# Altium PCB PCB1.PcbDoc (part 1 of 2)
Units mm, origin at the board's own origin, x right, y up, seen from the top; angles counter-clockwise.
Board outline 148.88 x 148.12 mm, 2 copper layers (Top Layer, Bottom Layer); 121 components, 61 nets, 373 pads, 52 vias.
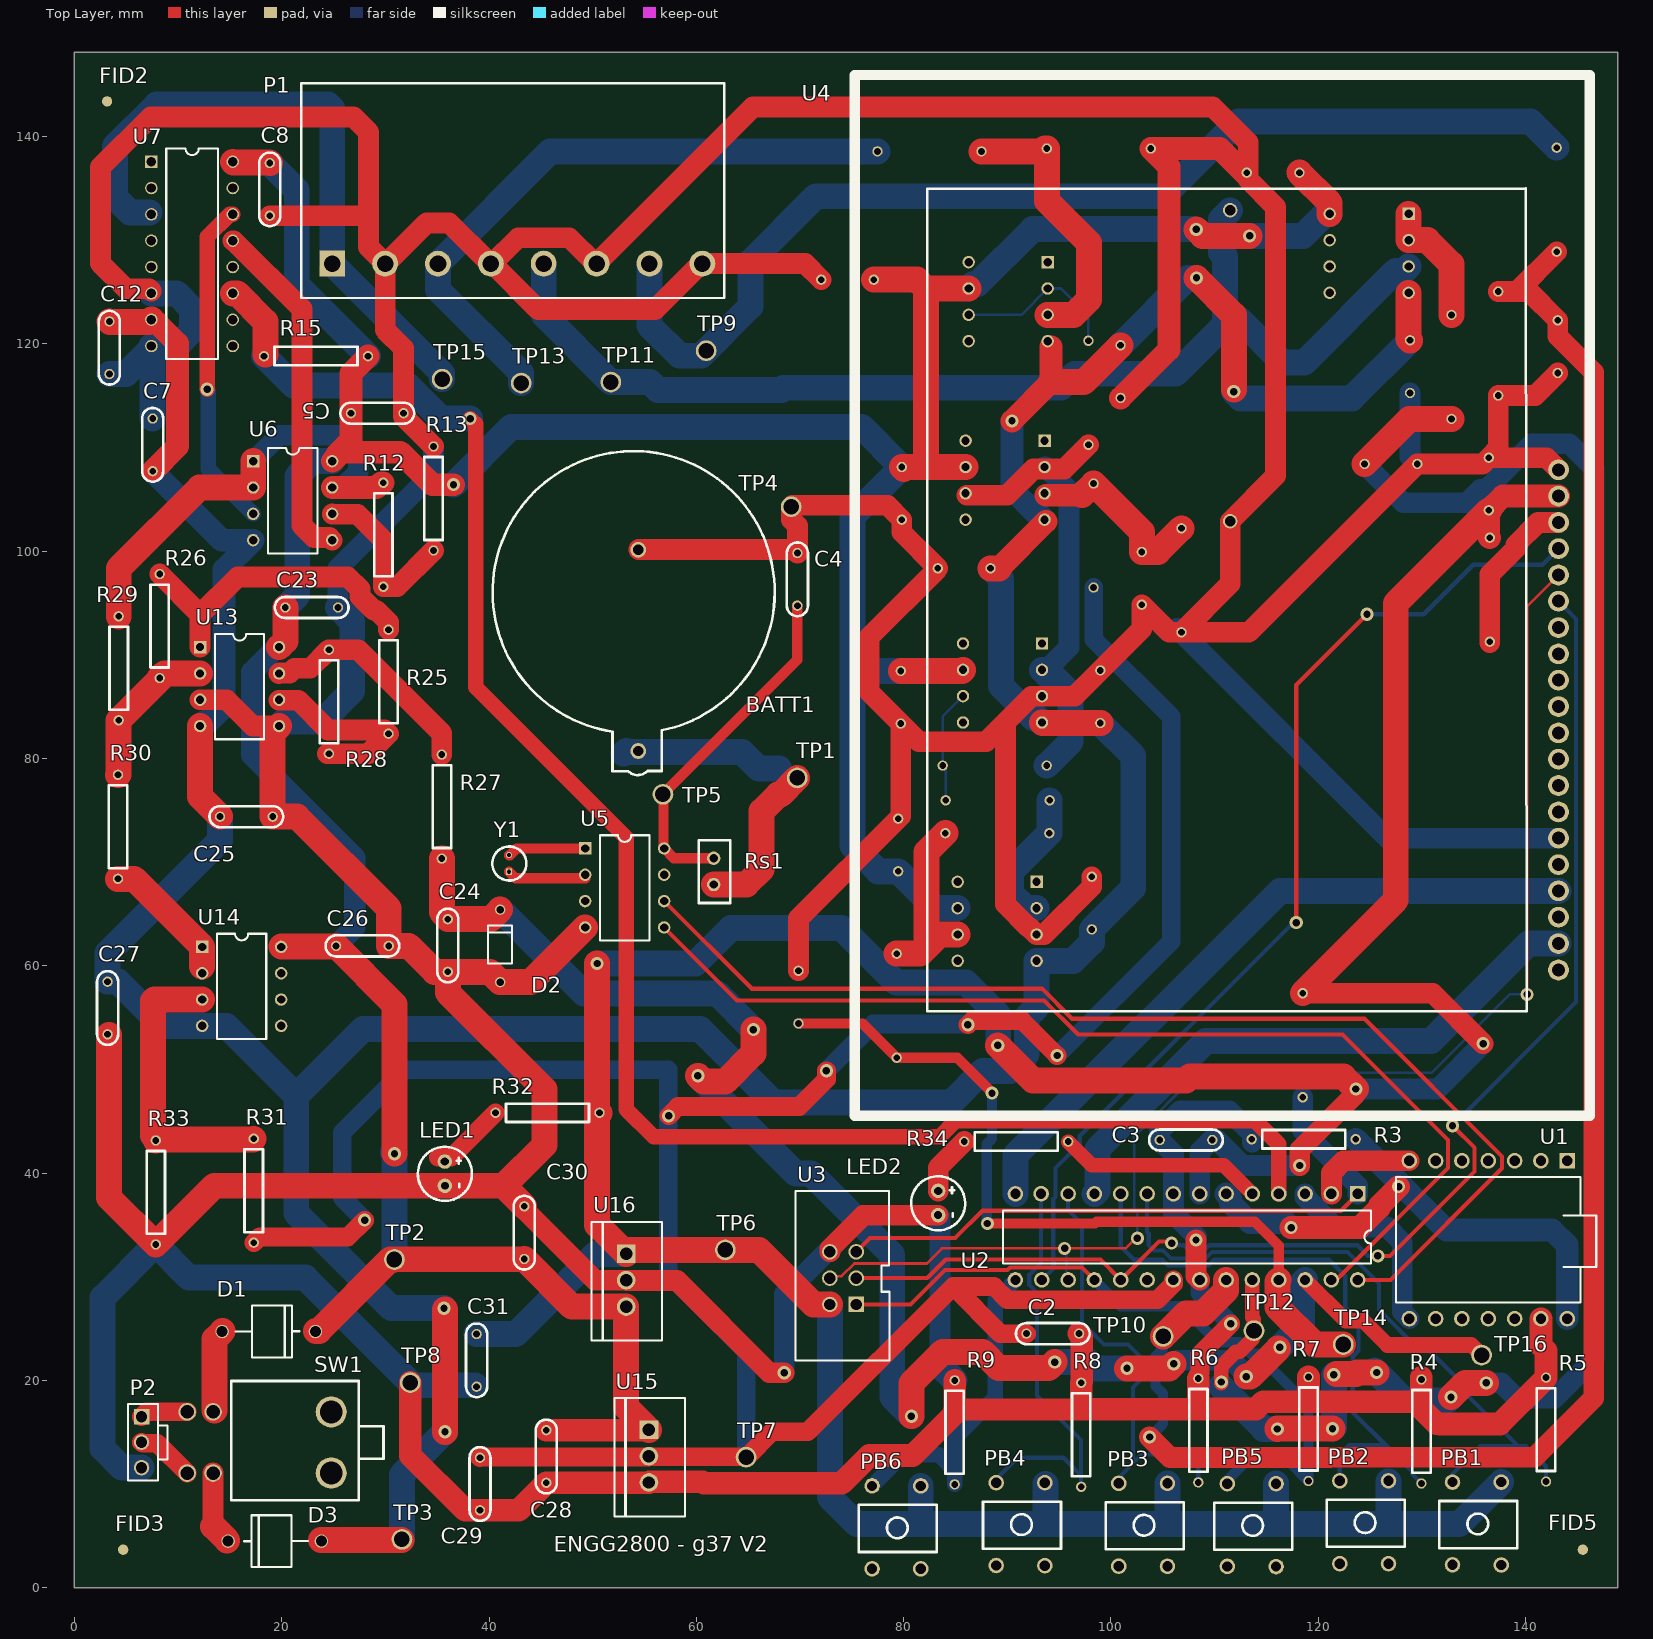
[diagram p0: Top Layer view]
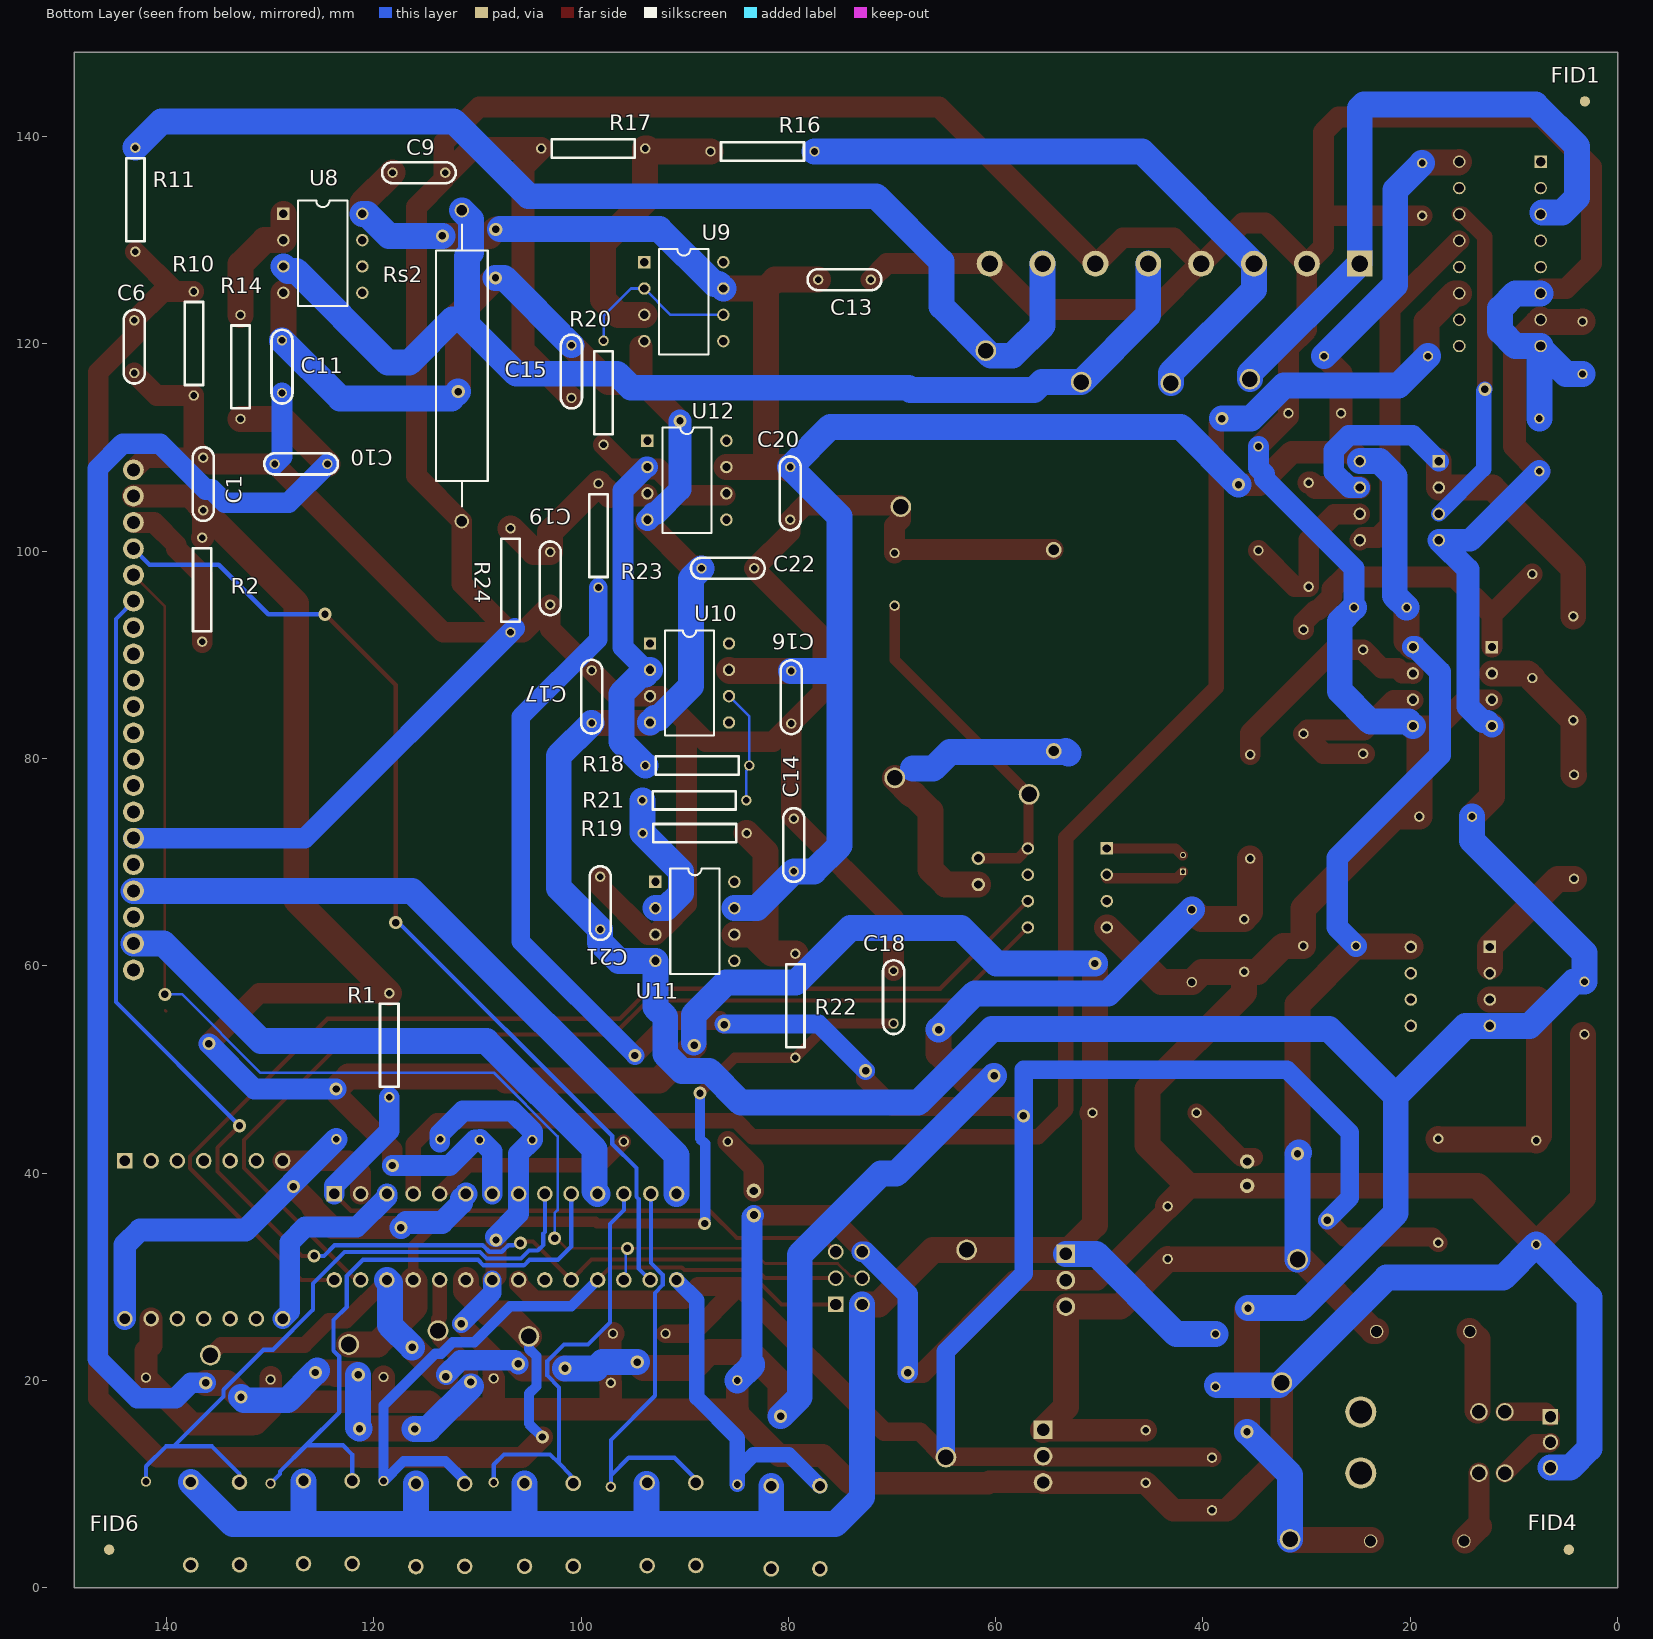
[diagram p1: Bottom Layer view, seen from below]

## Layer stack, top to bottom
Top Solder: solder mask 0.0102, Solder Resist, Dk 3.5
Top Layer: signal copper 0.0356
Dielectric 1: dielectric 0.32, FR-4, Dk 4.8
Bottom Layer: signal copper 0.0356
Bottom Solder: solder mask 0.0102, Solder Resist, Dk 3.5

## Board outline
0,0 148.875,0 148.875,148.125 0,148.125

## Design rules (kind name [scope] priority, off if disabled: settings)
Clearance [All] p1: gap=0.254 ignorepadtopadclearanceinfootprint=FALSE except(0: Arc-Hole Track-Hole SMDPad-Hole THPad-Hole Via-Hole Fill-Hole Poly-Hole Region-Hole Text-Hole)
PolygonConnect [All] p1: connectstyle=Relief reliefconductorwidth=0.254 reliefentries=4 polygonreliefangle="90 Angle" airgapwidth=0.254
RoutingVias [All] p1: holewidth=0.711 width=1.27 viastyle="Through Hole" minholewidth=0.711 minwidth=1.27 maxholewidth=0.711 maxwidth=1.27
SolderMaskExpansion [All] p1: expansion=0.102 istentingtop=FALSE
Width [All] p1: maxlimit=10 minlimit=0.254 preferedwidth=1 minimp=50.000000 maximp=50.000000 favimp=50.000000
30 further rules are at their usual default settings.

## Classes and differential pairs
component class Inputs2: C23 C24 C25 C26 C27 C28 C29 C30 C31 D1 D2 D3 LED1 LED2 P1 P2 R25 R26 R27 R28 R29 R30 R31 R32 R33 R34 SW1 TP9 TP10 TP11 TP12 TP13 TP14 TP15 TP16 U13 U14 U15 U16
component class Inputs1: C5 C6 C7 C8 C9 C10 C11 C12 C13 C14 C15 C16 C17 C18 C19 C20 C21 C22 R10 R11 R12 R13 R14 R15 R16 R17 R18 R19 R20 R21 R22 R23 R24 Rs2 U6 U7 U8 U9 U10 U11

## Components (designator, comment, footprint, x,y, rotation, side; value= is the part's Value field where it differs from the comment)
BATT1 "RTC_Battery" "BATTERY HOLDER" 54.4,80.725 r270 top
C1 "Capacitor" CAPACITOR 136.45,103.945 r90 bottom
C2 "Capacitor" CAPACITOR 91.845,24.525 r0 top
C3 "Capacitor" CAPACITOR 109.775,43.2 r180 top
C4 "Capacitor" CAPACITOR 69.75,94.75 r90 top
C5 "Capacitor" CAPACITOR 26.675,113.325 r0 top
C6 "Capacitor" CAPACITOR 143.1,122.28 r270 bottom
C7 "Capacitor" CAPACITOR 7.55,112.805 r270 top
C8 "Capacitor" CAPACITOR 18.85,137.45 r270 top
C9 "Capacitor" CAPACITOR 118.18,136.525 r180 bottom
C10 "Capacitor" CAPACITOR 129.55,108.425 r180 bottom
C11 "Capacitor" CAPACITOR 128.85,120.35 r270 bottom
C12 "Capacitor" CAPACITOR 3.375,117.095 r90 top
C13 "Capacitor" CAPACITOR 77.125,126.2 r180 bottom
C14 "Capacitor" CAPACITOR 79.475,69.12 r90 bottom
C15 "Capacitor" CAPACITOR 100.925,114.795 r90 bottom
C16 "Capacitor" CAPACITOR 79.725,88.455 r270 bottom
C17 "Capacitor" CAPACITOR 98.975,88.505 r270 bottom
C18 "Capacitor" CAPACITOR 69.85,59.525 r270 bottom
C19 "Capacitor" CAPACITOR 102.975,94.85 r90 bottom
C20 "Capacitor" CAPACITOR 79.825,108.125 r270 bottom
C21 "Capacitor" CAPACITOR 98.15,68.6 r270 bottom
C22 "Capacitor" CAPACITOR 83.3,98.35 r0 bottom
C23 "Capacitor" CAPACITOR 25.43,94.575 r180 top
C24 "Capacitor" CAPACITOR 36.025,59.425 r90 top
C25 "Capacitor" CAPACITOR 19.13,74.4 r180 top
C26 "Capacitor" CAPACITOR 25.245,61.925 r0 top
C27 "Capacitor" CAPACITOR 3.2,53.395 r90 top
C28 "Capacitor" CAPACITOR 45.525,10.125 r90 top
C29 "Capacitor" CAPACITOR 39.125,7.475 r90 top
C30 "Capacitor" CAPACITOR 43.4,36.805 r270 top
C31 "Capacitor" CAPACITOR 38.8,19.4 r90 top
D1 "Diode" DIODE 14.25,24.725 r0 top
D2 "3.3V" "ZENER DIODE (3V)" 41.075,58.425 r90 top
D3 "Diode" DIODE 23.825,4.5 r180 top
FID1 "FID_BOT" FIDUCIAL_TOP#1 3.15,143.4 r90 bottom
FID2 "FID_TOP" FIDUCIAL_TOP#2 3.15,143.4 r90 top
FID3 "FID_TOP" FIDUCIAL_TOP#2 4.7,3.675 r90 top
FID4 "FID_BOT" FIDUCIAL_TOP#1 4.7,3.675 r90 bottom
FID5 "FID_TOP" FIDUCIAL_TOP#2 145.525,3.675 r90 top
FID6 "FID_BOT" FIDUCIAL_TOP#1 145.525,3.675 r90 bottom
LED1 "RED" LED 35.75,41.125 r270 top
LED2 "Green" LED 83.335,38.29 r270 top
P1 "CKK 22.09.14" MEASUREMENT_SOCKET 24.875,127.75 r90 top
P2 "Molex Power Supply" MOLEX_POWER_SUPPLY 6.475,16.5 r0 top
PB1 "1825910-7" PUSHBUTTON 137.65,10.202 r270 top
PB2 "1825910-7" PUSHBUTTON 126.775,10.327 r270 top
PB3 "1825910-7" PUSHBUTTON 105.45,10.077 r270 top
PB4 "1825910-7" PUSHBUTTON 93.625,10.142 r270 top
PB5 "1825910-7" PUSHBUTTON 115.925,10.052 r270 top
PB6 "1825910-7" PUSHBUTTON 81.65,9.827 r270 top
R1 "Resistor" RESISTOR 118.5,57.358 r270 bottom
R2 "Resistor" RESISTOR 136.55,101.308 r270 bottom
R3 "Resistor" RESISTOR 113.575,43.275 r0 top
R4 "Resistor" RESISTOR 129.95,20.102 r270 top
R5 "Resistor" RESISTOR 141.975,20.283 r270 top
R6 "Resistor" RESISTOR 108.425,20.202 r270 top
R7 "Resistor" RESISTOR 119.05,20.335 r270 top
R8 "Resistor" RESISTOR 97.125,19.777 r270 top
R9 "Resistor" RESISTOR 84.925,20.01 r270 top
R10 "Resistor" RESISTOR 137.35,125.058 r270 bottom
R11 "Resistor" RESISTOR 143,128.9 r90 bottom
R12 "Resistor" RESISTOR 29.8,96.575 r90 top
R13 "Resistor" RESISTOR 34.65,110.108 r270 top
R14 "Resistor" RESISTOR 132.85,112.767 r90 bottom
R15 "4.7kΩ" RESISTOR 18.292,118.825 r0 top
R16 "Resistor" RESISTOR 77.475,138.575 r0 bottom
R17 "Resistor" RESISTOR 93.817,138.85 r0 bottom
R18 "Resistor" RESISTOR 93.8,79.325 r180 bottom
R19 "Resistor" RESISTOR 94.05,72.8 r180 bottom
R20 "Resistor" RESISTOR 97.825,120.308 r270 bottom
R21 "Resistor" RESISTOR 84.05,75.975 r0 bottom
R22 "Resistor" RESISTOR 79.325,61.175 r270 bottom
R23 "Resistor" RESISTOR 98.325,96.5 r90 bottom
R24 "Resistor" RESISTOR 106.8,92.175 r90 bottom
R25 "Resistor" RESISTOR 30.3,92.433 r270 top
R26 "Resistor" RESISTOR 8.225,87.767 r90 top
R27 "Resistor" RESISTOR 35.45,80.383 r270 top
R28 "Resistor" RESISTOR 24.55,80.475 r90 top
R29 "Resistor" RESISTOR 4.275,93.725 r270 top
R30 "Resistor" RESISTOR 4.2,68.4 r90 top
R31 "Resistor" RESISTOR 17.3,33.292 r90 top
R32 "300o" RESISTOR 50.658,45.825 r180 top
R33 "Resistor" RESISTOR 7.85,33.125 r90 top
R34 "Resistor" RESISTOR 95.875,43.05 r180 top
Rs1 "Removable Shunt" CURRENT_SHUNT 61.675,70.39 r270 top
Rs2 "DC_Shunt" DC_SHUNT 111.5,132.9 r270 bottom
SW1 "PB400EEQR1BLK" "PCBCOMPONENT_1 - DUPLICATE" 10.875,16.975 r0 top
TP1 "Red_Test_Point" TP 69.734,78.134 r0 top
TP2 "5010" TP 30.875,31.675 r0 top
TP3 "5010" TP 31.6,4.675 r0 top
TP4 "Red_Test_Point" TP 69.15,104.3 r0 top
TP5 "Red_Test_Point" TP 56.775,76.55 r0 top
TP6 "Red_Test_Point" TP 62.8,32.6 r0 top
TP7 "Red_Test_Point" TP 64.8,12.6 r0 top
TP8 "Black_Test_Point" TP 32.4,19.8 r0 top
TP9 "Yellow_Test_Point_1" TP 60.95,119.35 r0 top
TP10 "Yellow_Test_Point_1" TP 105.025,24.25 r0 top
TP11 "Yellow_Test_Point_1" TP 51.75,116.325 r0 top
TP12 "Yellow_Test_Point_1" TP 113.797,24.807 r90 top
TP13 "Yellow_Test_Point_1" TP 43.1,116.225 r90 top
TP14 "Yellow_Test_Point_1" TP 122.41,23.475 r90 top
TP15 "Yellow_Test_Point_1" TP 35.475,116.6 r90 top
TP16 "Yellow_Test_Point_1" TP 135.75,22.45 r90 top
U1 "Turtle" POLYGOT-TURTLE 144.02,41.2 r270 top
U2 "ATMEGA328P-PU" ATMEGA832P\ 123.805,38 r270 top
U3 "Encoder" ENCODER_NO_BREAKOUT 75.425,27.335 r180 top
U4 "LED Display" "LED DISPLAY" 146.175,135.6 r270 top
U5 "DS1307" "OP AMP" 49.275,71.33 r0 top
U6 "LM358P" "OP AMP" 17.25,108.69 r0 top
U7 "CD4051B" MULTIPLEXOR 7.425,137.58 r0 top
U8 "LM358P" "OP AMP" 128.72,132.555 r180 bottom
U9 "LF411CP" "OP AMP" 93.895,127.89 r180 bottom
U10 "LF411CP" "OP AMP" 93.345,91.1 r180 bottom
U11 "LF411CP" "OP AMP" 92.825,68.105 r180 bottom
U12 "LF411CP" "OP AMP" 93.595,110.665 r180 bottom
U13 "LM358P" "OP AMP" 12.125,90.755 r0 top
U14 "LM358P" "OP AMP" 12.325,61.83 r0 top
U15 "LM1117-3.3" "VOLTGE REGULATOR LM1117 (3.3)" 55.425,15.24 r0 top
U16 "LM7805" "VOLTGE REGULATOR LM7805 (5)" 53.245,32.215 r0 top
Y1 "Crystal" CRYSTAL 41.925,69.075 r90 top

## Footprints (in the part's own frame and the unit in brackets; to place one, negate y for a bottom-side part, rotate by r counter-clockwise, add the part's x,y. Pads: shape width x height; smd on the part's side, far side on the other; paste and mask are expansions set on the pad)
ATMEGA832P\ [mm]
  rect 1.5x1.5 hole 1: 1(0,0)
  round 1.5 hole 1: 2(0,-2.54) 3(0,-5.08) 4(0,-7.62) 5(0,-10.16) 6(0,-12.7) 7(0,-15.24) 8(0,-17.78) 9(0,-20.32) 10(0,-22.86) 11(0,-25.4) 12(0,-27.94) 13(-0.02,-30.55) 14(0,-33.02) 15(8.3,-33.02) 16(8.3,-30.48) 17(8.3,-27.94) 18(8.3,-25.4) 19(8.3,-22.86) 20(8.3,-20.32) 21(8.3,-17.78) 22(8.3,-15.24) 23(8.3,-12.7) 24(8.3,-10.16) 25(8.3,-7.62) 26(8.3,-5.08) 27(8.3,-2.54) 28(8.3,0)
  silkscreen extent 1.58,-34.21 6.72,1.27
"BATTERY HOLDER" [mil]
  round 60 hole 39.37: 1(0,0) 2(-764.17,0)
  silkscreen extent -1139,-554 91,518
CAPACITOR [mm]
  round 1 hole 0.65: 1(0,0) 2(5.08,0)
  silkscreen extent -1.01,-1.02 6.09,1.02
CRYSTAL [mm]
  rect 0.6x0.6 hole 0.4: 1(0,0)
  round 0.6 hole 0.4: 2(1.61,0)
  silkscreen extent -0.84,-1.67 2.44,1.61
CURRENT_SHUNT [mm]
  round 1.3 hole 0.8: 1(0,0) 2(2.54,0)
  silkscreen extent -1.74,-1.44 4.32,1.61
DC_SHUNT [mm]
  round 1.4 hole 1: 1(0,0) 2(30,0)
  silkscreen extent 1.4,-2.5 28.6,2.5
DIODE [mm]
  round 1.3 hole 1.05: 1(0,0) 2(9,0)
  silkscreen extent 1.3,-2.5 7.42,2.5
ENCODER_NO_BREAKOUT [mm]
  rect 1.5x1.5 hole 1.1: 1(0,0)
  round 1.5 hole 1.1: 2(0,-2.54) 3(0,-5.08) 4(2.54,-5.08) 5(2.54,-2.54) 6(2.54,0)
  silkscreen extent -3.19,-10.94 5.86,5.39
FIDUCIAL_TOP#1 [mm]
  round 1 / inner round 2 / far side round 0 all layers, no hole mask+0: F_T(0,0)
FIDUCIAL_TOP#2 [mm]
  round 1 / inner round 2 / far side round 0 all layers, no hole mask+1: F_T(0,0)
LED [mm]
  round 1.4 hole 0.8: 1(0,-0.01)
  round 1.4 hole 0.762: 2(2.34,-0.01)
  silkscreen extent -1.41,-2.62 3.8,2.6
"LED DISPLAY" [mm]
  round 2 hole 1.25: 1(76,-3) 2(73.45,-3) 3(70.9,-3) 4(68.36,-3) 5(65.84,-3) 6(63.28,-3) 7(60.75,-3) 8(58.2,-3) 9(55.66,-3) 10(53.12,-3) 11(50.58,-3) 12(48.04,-3) 13(45.5,-3) 14(42.96,-3) 15(40.42,-3) 16(37.89,-3) 17(35.35,-2.99) 18(32.82,-2.99) 19(30.28,-2.99) 20(27.74,-2.99)
  Top Layer lines w0.254: 79.985,-6.147 79.908,-6.071
  silkscreen extent -10.35,-70.89 90.04,0
MEASUREMENT_SOCKET [mm]
  rect 2.5x2.5 hole 1.6: 1(0,0)
  round 2.5 hole 1.6: 2(0,-5.1) 3(0,-10.2) 4(0,-15.3) 5(0,-20.4) 6(0,-25.5) 7(0,-30.6) 8(0,-35.7)
  silkscreen extent -3.3,-37.8 17.4,3
MOLEX_POWER_SUPPLY [mm]
  rect 1.5x1.5 hole 1.1: 1(0,0)
  round 1.5 hole 1.1: 2(0,-2.45) 3(0,-4.9)
  silkscreen extent -1.29,-6.14 2.5,1.24
MULTIPLEXOR [mm]
  rect 1.2x1.2 hole 0.9: 1(0,0)
  round 1.2 hole 0.9: 2(0,-2.54) 3(0,-5.08) 4(0,-7.62) 5(0,-10.16) 6(0,-12.7) 7(0,-15.24) 8(0,-17.78) 9(7.85,-17.78) 10(7.85,-15.24) 11(7.85,-12.7) 12(7.85,-10.16) 13(7.85,-7.62) 14(7.85,-5.08) 15(7.85,-2.54) 16(7.85,0)
  silkscreen extent 1.43,-19.05 6.42,1.27
"OP AMP" [mm]
  rect 1.2x1.2 hole 0.8: 1(0,0)
  round 1.2 hole 0.8: 2(0,-2.54) 3(0,-5.08) 4(0,-7.62) 5(7.62,-7.62) 6(7.62,-5.08) 7(7.62,-2.54) 8(7.62,0)
  silkscreen extent 1.43,-8.89 6.19,1.27
"PCBCOMPONENT_1 - DUPLICATE" [mm]
  round 1.7 hole 1.3: 1(0,0) 2(2.5,0) 3(0,-5.9) 4(2.5,-5.9)
  round 3 hole 2.2: B1(13.9,-5.9) B2(13.9,0)
  silkscreen extent 4.24,-8.52 18.95,2.98
POLYGOT-TURTLE [mm]
  rect 1.5x1.5 hole 1: 1(0,0)
  round 1.5 hole 1: 2(0,-2.54) 3(0,-5.08) 4(0,-7.62) 5(0,-10.16) 6(0,-12.7) 7(0,-15.24) 8(15.24,-15.24) 9(15.24,-12.7) 10(15.24,-10.16) 11(15.24,-7.62) 12(15.24,-5.08) 13(15.24,-2.54) 14(15.24,0)
  silkscreen extent 1.57,-16.51 13.67,2.79
PUSHBUTTON [mm]
  round 1.5 hole 1: 1(0,0) 2(0,-4.7) 3(8,0) 4(7.99,-4.7)
  silkscreen extent 1.83,-5.97 6.37,1.56
RESISTOR [mm]
  round 1 hole 0.65: 1(0,0) 2(10.033,0)
  silkscreen extent 1.02,-0.89 9.02,0.89
TP [mm]
  round 2 hole 1.5: 1(0,0)
"VOLTGE REGULATOR LM1117 (3.3)" [mm]
  rect 1.8x1.8 hole 1.2: 1(0,0)
  round 1.8 hole 1.2: 2(0,-5.08) 3(0,-2.54)
  silkscreen extent -3.34,-8.34 3.47,3.08
"VOLTGE REGULATOR LM7805 (5)" [mm]
  round 1.8 hole 1.2: 1(-0.02,-5.08) 2(-0.02,-2.54)
  rect 1.8x1.8 hole 1.2: 3(-0.02,0)
  silkscreen extent -3.36,-8.34 3.45,3.08
"ZENER DIODE (3V)" [mm]
  round 1 hole 0.75: 1(0,0) 2(7,0)
  silkscreen extent 1.82,-1.15 5.48,1.18

## Part data
D2: library part "Zener Diode"
FID1 FID4 FID6: library part FID_Bottom
LED1: library part RED_LED
LED2: library part Green_LED
P1: library part Measurement_Input_Terminal
PB1 PB2 PB3 PB4 PB5 PB6: "Keypad Switch, 1 Switches, SPST, Momentary, 0.05A, 24VDC, 2.548N, Solder Terminal, Panel Mount", Color="Black, Red", Contact Current Rating=50mA, Contact Resistance=100mΩ, Manufacturer="TE Connectivity", Manufacturer Lifecycle Status=ACTIVE, Max Operating Temperature=85°C, Max Voltage Rating (DC)=24V, Min Operating Temperature=-35°C, Operating Force=2.548N, Supplier Part Number 1=450-1804-ND, Actuator Length=1.397mm, Actuator Material=PBT, Category="Pushbutton Switches", China RoHS=Compliant, ComponentLink1Description=https://datasheet.octopart.com:443/1825910-7-TE-Connectivity-datasheet-179971976.pdf?src-supplier=IHS, ComponentLink1URL=https://datasheet.octopart.com:443/1825910-7-TE-Connectivity-datasheet-179971976.pdf?src-supplier=IHS, ComponentLink2Description=https://sigma.octopart.com:443/101748000/technical_drawing/TE-Connectivity-1825910-7.pdf?src-supplier=Sager+Electronics, ComponentLink2URL=https://sigma.octopart.com:443/101748000/technical_drawing/TE-Connectivity-1825910-7.pdf?src-supplier=Sager+Electronics, ComponentLink3Description=https://sigma.octopart.com:443/12291753/technical_drawing/TE-Connectivity-1825910-7.pdf?src-supplier=TE+Connectivity, ComponentLink3URL=https://sigma.octopart.com:443/12291753/technical_drawing/TE-Connectivity-1825910-7.pdf?src-supplier=TE+Connectivity, ComponentLink4Description=https://datasheet.octopart.com:443/1825910-7-TE-Connectivity-datasheet-10294628.pdf?src-supplier=Newark, ComponentLink4URL=https://datasheet.octopart.com:443/1825910-7-TE-Connectivity-datasheet-10294628.pdf?src-supplier=Newark, ComponentLink5Description=https://sigma.octopart.com:443/58177301/technical_drawing/TE-Connectivity-1825910-7.pdf?src-supplier=Farnell, ComponentLink5URL=https://sigma.octopart.com:443/58177301/technical_drawing/TE-Connectivity-1825910-7.pdf?src-supplier=Farnell, ComponentLink6Description=https://datasheet.octopart.com:443/1825910-7-TE-Connectivity---Alcoswitch-datasheet-33021037.pdf?src-supplier=Farnell, ComponentLink6URL=https://datasheet.octopart.com:443/1825910-7-TE-Connectivity---Alcoswitch-datasheet-33021037.pdf?src-supplier=Farnell, ComponentLink7Description=https://datasheet.octopart.com:443/1825910-7-TE-Connectivity---AMP-datasheet-23715109.pdf?src-supplier=Electro+Sonic, ComponentLink7URL=https://datasheet.octopart.com:443/1825910-7-TE-Connectivity---AMP-datasheet-23715109.pdf?src-supplier=Electro+Sonic, ComponentLink8Description=https://datasheet.octopart.com:443/1825910-7-TE-Connectivity-datasheet-145419879.pdf?src-supplier=RS+(Formerly+Allied+Electronics), ComponentLink8URL=https://datasheet.octopart.com:443/1825910-7-TE-Connectivity-datasheet-145419879.pdf?src-supplier=RS+(Formerly+Allied+Electronics), ComponentLink9Description=https://datasheet.octopart.com:443/1825910-7-TE-Connectivity---AMP-datasheet-189108451.pdf?src-supplier=Master+Electronics, ComponentLink9URL=https://datasheet.octopart.com:443/1825910-7-TE-Connectivity---AMP-datasheet-189108451.pdf?src-supplier=Master+Electronics, ComponentLink10Description=http://sigma.octopart.com:80/14574254/rohs_statement/TE-Connectivity-1825910-7.pdf?src-supplier=Compliance+Statements, ComponentLink10URL=http://sigma.octopart.com:80/14574254/rohs_statement/TE-Connectivity-1825910-7.pdf?src-supplier=Compliance+Statements, ComponentLink11Description=http://sigma.octopart.com:80/41598134/materials_sheet/TE-Connectivity-1825910-7.pdf?src-supplier=Compliance+Statements, ComponentLink11URL=http://sigma.octopart.com:80/41598134/materials_sheet/TE-Connectivity-1825910-7.pdf?src-supplier=Compliance+Statements, Contact Material=Silver, Contact Plating=Silver, Current Rating=50mA, Depth=7.8mm, Electrical Life=100kcycles, ELV=Compliant, Export Control Classification Number (ECCN) Code=EAR99, Harmonized Tariff Schedule (HTS) Code=8536.50.90.40, Height=3.61mm, Housing Material=Nylon, Illumination Type="Illuminated, Non-Illuminated", Introduction Date=2008-01-30, Lead Free="Lead Free", Length=5.99mm, Lifecycle Status=Production, Manufacturer Part Number=1825910-7, Max Current Rating=50mA, Mechanical Life=100kcycles, Mount="Surface Mount, Through Hole", Number of Positions=1, Orientation=Straight, Packaging=Bulk, Pricing 1="1=0.13, 10=0.118, 25=0.1112, 100=0.1001, 250=0.093, 750=0.08485, 1500=0.08009, 3000=0.07565, 5250=0.07234 (USD)", Radiation Hardening=No, REACH SVHC=Yes, RoHS=Compliant, Schedule B="8536509065, 8536509065|8536509065|8536509065|8536509065|8536509065|8536509065|8536509065|8536509065|8536509065|8536509065|8536509065|8536509065|8536509065|8536509065|8536509065|8536509065|8536509065|8536509065|8536509065|8536509065|8536509065|8536509065|8536509065|85", Stock 1=35870, Supplier 1=DigiKey, Switch Function=Off-Mom, Switch Travel=250µm, Termination="PC Pins, Solder", Throw Configuration=SPST, Type=Switch, Voltage Rating (DC)=24V
R15 R32: library part Resistor
Rs1: library part Current_Test_Shunt, "Current_Shunt"
SW1: "Pushbutton Switch, DPST, Standard Through Hole, Right Angle, Off-On Function, 30V, Black", Contact Current Rating=3A, Contact Resistance=30mΩ, Insulation Resistance=500MΩ, Manufacturer=E-Switch, Max Operating Temperature=60°C, Max Voltage Rating (DC)=30V, Min Operating Temperature=-5°C, Operating Force=7N, Supplier Part Number 1=EG5547-ND, Actuator Length=10.4902mm, Category="Pushbutton Switches", ComponentLink1Description=https://datasheet.octopart.com:443/PB400EEQR1BLK-E-Switch-datasheet-182202396.pdf?src-supplier=IHS, ComponentLink1URL=https://datasheet.octopart.com:443/PB400EEQR1BLK-E-Switch-datasheet-182202396.pdf?src-supplier=IHS, ComponentLink2Description=https://datasheet.octopart.com:443/PB400EEQR1BLK-E-Switch-datasheet-190233233.pdf?src-supplier=New+Yorker+Electronics, ComponentLink2URL=https://datasheet.octopart.com:443/PB400EEQR1BLK-E-Switch-datasheet-190233233.pdf?src-supplier=New+Yorker+Electronics, ComponentLink3Description=https://datasheet.octopart.com:443/PB400EEQR1BLK-E-Switch-datasheet-103039574.pdf?src-supplier=element14+APAC, ComponentLink3URL=https://datasheet.octopart.com:443/PB400EEQR1BLK-E-Switch-datasheet-103039574.pdf?src-supplier=element14+APAC, ComponentLink4Description=https://datasheet.octopart.com:443/PB400EEQR1BLK-E-Switch-datasheet-156105207.pdf?src-supplier=Future+Electronics, ComponentLink4URL=https://datasheet.octopart.com:443/PB400EEQR1BLK-E-Switch-datasheet-156105207.pdf?src-supplier=Future+Electronics, Contact Material=Silver, Electrical Life=6kcycles, Export Control Classification Number (ECCN) Code=EAR99, Harmonized Tariff Schedule (HTS) Code=8536.50.90.33, Height=10.2mm, Introduction Date=2017-12-19, Length=11mm, Lifecycle Status=Production, Manufacturer Part Number=PB400EEQR1BLK, Max Current Rating=3A, Number of Positions=2, Pricing 1="1=2.09, 10=1.807, 25=1.7048, 50=1.6308, 100=1.56, 324=1.4466, 648=1.38355, 1296=1.32313 (USD)", REACH SVHC=Yes, RoHS=Compliant, Stock 1=7960, Supplier 1=DigiKey, Throw Configuration=DPST
TP2 TP3: library part Red_Test_Point
U1: library part 102010328, "SAMD21 Microcontroller Development Board 0.0327MHz/48MHzCPU 32KB RAM 256KB Flash", Manufacturer="Seeed Studio", Supplier Part Number 1=1597-102010328-ND, Category="DSPs - Digital Signal Processors", Manufacturer Part Number=102010328, Pricing 1="1=5.4 (USD)", Schedule B=8471490000, Stock 1=4270, Supplier 1=DigiKey
U2: "Microchip - ATMEGA328P-PU - Microcontroller Mcu, 8 Bit, Atmega, 20MHZ, DIP-28", Case/Package=PDIP, Frequency=20MHz, Manufacturer=Microchip, Manufacturer Lifecycle Status=REL, Max Operating Temperature=85°C, Max Supply Voltage=5.5V, Min Operating Temperature=-40°C, Min Supply Voltage=1.8V, Supplier Part Number 1=ATMEGA328P-PU-ND, Category=Microcontrollers, ComponentLink1Description=https://datasheet.octopart.com:443/ATMEGA328P-PU-Microchip-datasheet-147334532.pdf?src-supplier=Microchip, ComponentLink1URL=https://datasheet.octopart.com:443/ATMEGA328P-PU-Microchip-datasheet-147334532.pdf?src-supplier=Microchip, ComponentLink2Description=https://datasheet.octopart.com:443/ATMEGA328P-PU-Microchip-datasheet-148646239.pdf?src-supplier=Microchip, ComponentLink2URL=https://datasheet.octopart.com:443/ATMEGA328P-PU-Microchip-datasheet-148646239.pdf?src-supplier=Microchip, ComponentLink3Description=https://datasheet.octopart.com:443/ATMEGA328P-PU-Microchip-datasheet-68295846.pdf?src-supplier=SHENGYU+ELECTRONICS, ComponentLink3URL=https://datasheet.octopart.com:443/ATMEGA328P-PU-Microchip-datasheet-68295846.pdf?src-supplier=SHENGYU+ELECTRONICS, ComponentLink4Description=https://datasheet.octopart.com:443/ATMEGA328P-PU-Microchip-datasheet-14421303.pdf?src-supplier=Upverter, ComponentLink4URL=https://datasheet.octopart.com:443/ATMEGA328P-PU-Microchip-datasheet-14421303.pdf?src-supplier=Upverter, ComponentLink5Description=https://datasheet.octopart.com:443/ATMEGA328P-PU-Atmel-datasheet-34147914.pdf?src-supplier=Upverter, ComponentLink5URL=https://datasheet.octopart.com:443/ATMEGA328P-PU-Atmel-datasheet-34147914.pdf?src-supplier=Upverter, ComponentLink6Description=https://datasheet.octopart.com:443/ATMEGA328P-PU-Atmel-datasheet-14353408.pdf?src-supplier=Upverter, ComponentLink6URL=https://datasheet.octopart.com:443/ATMEGA328P-PU-Atmel-datasheet-14353408.pdf?src-supplier=Upverter, ComponentLink7Description=https://datasheet.octopart.com:443/ATMEGA328P-PU-Microchip-datasheet-133520744.pdf?src-supplier=LKR, ComponentLink7URL=https://datasheet.octopart.com:443/ATMEGA328P-PU-Microchip-datasheet-133520744.pdf?src-supplier=LKR, ComponentLink8Description=https://datasheet.octopart.com:443/ATMEGA328P-PU-Microchip-datasheet-62316222.pdf?src-supplier=element14+APAC, ComponentLink8URL=https://datasheet.octopart.com:443/ATMEGA328P-PU-Microchip-datasheet-62316222.pdf?src-supplier=element14+APAC, ComponentLink9Description=https://datasheet.octopart.com:443/ATMEGA328P-PU-Atmel-datasheet-13381135.pdf?src-supplier=element14+APAC, ComponentLink9URL=https://datasheet.octopart.com:443/ATMEGA328P-PU-Atmel-datasheet-13381135.pdf?src-supplier=element14+APAC, ComponentLink10Description=https://datasheet.octopart.com:443/ATMEGA328P-PU-Microchip-datasheet-154741723.pdf?src-supplier=Electro+Sonic, ComponentLink10URL=https://datasheet.octopart.com:443/ATMEGA328P-PU-Microchip-datasheet-154741723.pdf?src-supplier=Electro+Sonic, ComponentLink11Description=https://datasheet.octopart.com:443/ATMEGA328P-PU-Microchip-datasheet-100453898.pdf?src-supplier=Burklin+Elektronik, ComponentLink11URL=https://datasheet.octopart.com:443/ATMEGA328P-PU-Microchip-datasheet-100453898.pdf?src-supplier=Burklin+Elektronik, ComponentLink12Description=https://datasheet.octopart.com:443/ATMEGA328P-PU-Atmel-datasheet-30457899.pdf?src-supplier=Seeed+Studio, ComponentLink12URL=https://datasheet.octopart.com:443/ATMEGA328P-PU-Atmel-datasheet-30457899.pdf?src-supplier=Seeed+Studio, ComponentLink13Description=https://datasheet.octopart.com:443/ATMEGA328P-PU-Microchip-datasheet-10842036.pdf?src-supplier=SOS+electronic, ComponentLink13URL=https://datasheet.octopart.com:443/ATMEGA328P-PU-Microchip-datasheet-10842036.pdf?src-supplier=SOS+electronic, ComponentLink14Description=https://datasheet.octopart.com:443/ATMEGA328P-PU-Microchip-datasheet-8364063.pdf?src-supplier=Jameco, ComponentLink14URL=https://datasheet.octopart.com:443/ATMEGA328P-PU-Microchip-datasheet-8364063.pdf?src-supplier=Jameco, ComponentLink15Description=https://datasheet.octopart.com:443/ATMEGA328P-PU-Microchip-datasheet-154323124.pdf?src-supplier=Jameco, ComponentLink15URL=https://datasheet.octopart.com:443/ATMEGA328P-PU-Microchip-datasheet-154323124.pdf?src-supplier=Jameco, ComponentLink16Description=https://datasheet.octopart.com:443/ATMEGA328P-PU-Atmel-datasheet-10389530.pdf?src-supplier=Newark, ComponentLink16URL=https://datasheet.octopart.com:443/ATMEGA328P-PU-Atmel-datasheet-10389530.pdf?src-supplier=Newark, ComponentLink17Description=https://datasheet.octopart.com:443/ATMEGA328P-PU-Microchip-datasheet-65729177.pdf?src-supplier=TME, ComponentLink17URL=https://datasheet.octopart.com:443/ATMEGA328P-PU-Microchip-datasheet-65729177.pdf?src-supplier=TME, ComponentLink18Description=https://datasheet.octopart.com:443/ATMEGA328P-PU-Microchip-datasheet-101746195.pdf?src-supplier=Future+Electronics, ComponentLink18URL=https://datasheet.octopart.com:443/ATMEGA328P-PU-Microchip-datasheet-101746195.pdf?src-supplier=Future+Electronics, ComponentLink19Description=http://sigma.octopart.com:80/188450569/materials_sheet/Microchip-ATMEGA328P-PU.pdf?src-supplier=Compliance+Statements, ComponentLink19URL=http://sigma.octopart.com:80/188450569/materials_sheet/Microchip-ATMEGA328P-PU.pdf?src-supplier=Compliance+Statements, ComponentLink20Description=http://sigma.octopart.com:80/rohs_statement/Microchip-company-71.pdf?src-supplier=Compliance+Statements, ComponentLink20URL=http://sigma.octopart.com:80/rohs_statement/Microchip-company-71.pdf?src-supplier=Compliance+Statements, ComponentLink21Description=http://sigma.octopart.com:80/reach_statement/Microchip-company-70.pdf?src-supplier=Compliance+Statements, ComponentLink21URL=http://sigma.octopart.com:80/reach_statement/Microchip-company-70.pdf?src-supplier=Compliance+Statements, ComponentLink22Description=http://sigma.octopart.com:80/conflict_mineral_statement/Microchip-company-69.pdf?src-supplier=Compliance+Statements, ComponentLink22URL=http://sigma.octopart.com:80/conflict_mineral_statement/Microchip-company-69.pdf?src-supplier=Compliance+Statements, ComponentLink23Description=http://sigma.octopart.com:80/conflict_mineral_statement/Microchip-company-68.pdf?src-supplier=Compliance+Statements, ComponentLink23URL=http://sigma.octopart.com:80/conflict_mineral_statement/Microchip-company-68.pdf?src-supplier=Compliance+Statements, ComponentLink24Description=http://sigma.octopart.com:80/reach_statement/Atmel-company-6.pdf?src-supplier=Compliance+Statements, ComponentLink24URL=http://sigma.octopart.com:80/reach_statement/Atmel-company-6.pdf?src-supplier=Compliance+Statements, ComponentLink25Description=http://sigma.octopart.com:80/rohs_statement/Atmel-company-5.pdf?src-supplier=Compliance+Statements, ComponentLink25URL=http://sigma.octopart.com:80/rohs_statement/Atmel-company-5.pdf?src-supplier=Compliance+Statements, ComponentLink26Description=http://sigma.octopart.com:80/rohs_statement/Atmel-company-4.pdf?src-supplier=Compliance+Statements, ComponentLink26URL=http://sigma.octopart.com:80/rohs_statement/Atmel-company-4.pdf?src-supplier=Compliance+Statements, Contact Plating=Tin, Core Architecture=AVR, Country of Assembly=Thailand, Country of Fabrication="United States of America", Country of Origin=Thailand, Data Bus Width=8b, Export Control Classification Number (ECCN) Code=EAR99, Harmonized Tariff Schedule (HTS) Code=8542.31.0015, Height=3.28mm, Interface="2-Wire, I2C, SPI, UART, USART", Lead Free="Lead Free", Length=37.4mm, Lifecycle Status=Production, Manufacturer Part Number=ATMEGA328P-PU, Max Frequency=20MHz, Memory Size=32kB, Memory Type=FLASH, Mount="Through Hole", Number of ADC Channels=6, Number of I2C Channels=1, Number of I/Os=23, Number of Pins=28, Number of Programmable I/O=23, Number of PWM Channels=6, Number of SPI Channels=1, Number of Timers/Counters=3, Oscillator Type=Internal, Peripherals="Brown-out Detect/Reset, POR, PWM, WDT", Pricing 1="1=2.89, 25=2.65, 100=2.39 (USD)", Projected EOL Date=2039-11-04, Radiation Hardening=No, RAM Size=2kB, REACH SVHC=No, RoHS=Compliant, Schedule B="8542310000, 8542310000|8542310000|8542310000|8542310000|8542310000", Stock 1=49916, Supplier 1=DigiKey, Watchdog Timer=Yes, Width=6.76mm
U3: library part 1465, "Adafruit 6-Pin Avr Isp Breadboard Adapter Mini Kit", Manufacturer="Adafruit Industries", Supplier Part Number 1=1528-1189-ND, Category=Uncategorized, Manufacturer Part Number=1465, Pricing 1="1=0.95 (USD)", RoHS=Compliant, Schedule B="8542900000, 8542900000|8542900000|8542900000|8542900000|8542900000", Stock 1=113, Supplier 1=DigiKey
U4: library part Display
U5: library part RTC
U6 U8 U13 U14: "Operational Amplifier, Dual, 700 Khz, 2, 0.4 V/ S, 1.5V To 16V, Dip, 8 Rohs Compliant: Yes", Case/Package=PDIP, Dual Supply Voltage=9V, Input Bias Current=250nA, Input Offset Voltage (Vos)=7mV, Manufacturer="Texas Instruments", Manufacturer Lifecycle Status=ACTIVE, Max Dual Supply Voltage=16V, Max Operating Temperature=70°C, Max Supply Current=700µA, Max Supply Voltage=32V, Min Dual Supply Voltage=1.5V, Min Operating Temperature=0°C, Min Supply Voltage=3V, Nominal Supply Current=1.2mA, Operating Supply Current=1mA, Output Current=30mA, Power Supply Rejection Ratio (PSRR)=65dB, Supplier Part Number 1=296-1395-5-ND, Voltage Gain=100dB, Bandwidth=1MHz, Category="Amplifiers - Op Amps, Buffer, Instrumentation", Common Mode Rejection Ratio=65dB, ComponentLink1Description=https://datasheet.octopart.com:443/LM358P-Texas-Instruments-datasheet-22122189.pdf?src-supplier=Texas+Instruments, ComponentLink1URL=https://datasheet.octopart.com:443/LM358P-Texas-Instruments-datasheet-22122189.pdf?src-supplier=Texas+Instruments, ComponentLink2Description=https://octopart.com:443/opatz8j6/c1?t=oqAI8rLcFpUCwQz3XpiQyJu6cvQHEZqsQz-ajVCN9ANwwKTOsKfzA42PIMJelGWuzT3h6SD-c6fpyT0gSSX2jEno0skou8v9j3Jn_12a0HifiHKIe5xyb9D0ZmJu35xXUPkKHYTg9gNLLOZNL_ZRlu9lopCJkqKAh8-EcsD-mij-HCuIcf6e5wcGllE6vrwhH9FYTnOeC7BJcBEDEy-SR6Gf13-dAeqi_gwlv4VpfKxqzu3VdIKpO-63Eg9hZr4wxMFv42TwUYIo25Tt9ZzY3CMy4ptzf0nP6hbmpRkagDXPpxp0_YPC_pQDbKIScxns-zstyRPAOYYCKtuU7TPlFeKjWR049V7cUehsluTRxHTQ5ZZ8Ynx5nPbUd9yzTscO&src-supplier=Texas+Instruments, ComponentLink2URL=https://octopart.com:443/opatz8j6/c1?t=oqAI8rLcFpUCwQz3XpiQyJu6cvQHEZqsQz-ajVCN9ANwwKTOsKfzA42PIMJelGWuzT3h6SD-c6fpyT0gSSX2jEno0skou8v9j3Jn_12a0HifiHKIe5xyb9D0ZmJu35xXUPkKHYTg9gNLLOZNL_ZRlu9lopCJkqKAh8-EcsD-mij-HCuIcf6e5wcGllE6vrwhH9FYTnOeC7BJcBEDEy-SR6Gf13-dAeqi_gwlv4VpfKxqzu3VdIKpO-63Eg9hZr4wxMFv42TwUYIo25Tt9ZzY3CMy4ptzf0nP6hbmpRkagDXPpxp0_YPC_pQDbKIScxns-zstyRPAOYYCKtuU7TPlFeKjWR049V7cUehsluTRxHTQ5ZZ8Ynx5nPbUd9yzTscO&src-supplier=Texas+Instruments, ComponentLink3Description=https://sigma.octopart.com:443/49250158/technical_drawing/Texas-Instruments-LM358P.pdf?src-supplier=Texas+Instruments, ComponentLink3URL=https://sigma.octopart.com:443/49250158/technical_drawing/Texas-Instruments-LM358P.pdf?src-supplier=Texas+Instruments, ComponentLink4Description=https://datasheet.octopart.com:443/LM358P-Texas-Instruments-datasheet-149604.pdf?src-supplier=Upverter, ComponentLink4URL=https://datasheet.octopart.com:443/LM358P-Texas-Instruments-datasheet-149604.pdf?src-supplier=Upverter, ComponentLink5Description=https://datasheet.octopart.com:443/LM358P-Texas-Instruments-datasheet-16079558.pdf?src-supplier=Upverter, ComponentLink5URL=https://datasheet.octopart.com:443/LM358P-Texas-Instruments-datasheet-16079558.pdf?src-supplier=Upverter, ComponentLink6Description=https://datasheet.octopart.com:443/LM358P-Texas-Instruments-datasheet-81454335.pdf?src-supplier=Farnell, ComponentLink6URL=https://datasheet.octopart.com:443/LM358P-Texas-Instruments-datasheet-81454335.pdf?src-supplier=Farnell, ComponentLink7Description=https://datasheet.octopart.com:443/LM358P.-Texas-Instruments-datasheet-65712975.pdf?src-supplier=Farnell, ComponentLink7URL=https://datasheet.octopart.com:443/LM358P.-Texas-Instruments-datasheet-65712975.pdf?src-supplier=Farnell, ComponentLink8Description=https://datasheet.octopart.com:443/LM358P.-Texas-Instruments-datasheet-32750560.pdf?src-supplier=Farnell, ComponentLink8URL=https://datasheet.octopart.com:443/LM358P.-Texas-Instruments-datasheet-32750560.pdf?src-supplier=Farnell, ComponentLink9Description=https://datasheet.octopart.com:443/LM358P-Texas-Instruments-datasheet-10672735.pdf?src-supplier=Farnell, ComponentLink9URL=https://datasheet.octopart.com:443/LM358P-Texas-Instruments-datasheet-10672735.pdf?src-supplier=Farnell, ComponentLink10Description=https://datasheet.octopart.com:443/LM358P..-Texas-Instruments-datasheet-36780029.pdf?src-supplier=element14+APAC, ComponentLink10URL=https://datasheet.octopart.com:443/LM358P..-Texas-Instruments-datasheet-36780029.pdf?src-supplier=element14+APAC, ComponentLink11Description=https://datasheet.octopart.com:443/LM358P-Texas-Instruments-datasheet-2970.pdf?src-supplier=DigiKey, ComponentLink11URL=https://datasheet.octopart.com:443/LM358P-Texas-Instruments-datasheet-2970.pdf?src-supplier=DigiKey, ComponentLink12Description=https://datasheet.octopart.com:443/LM358P-Texas-Instruments-datasheet-159115118.pdf?src-supplier=LCSC, ComponentLink12URL=https://datasheet.octopart.com:443/LM358P-Texas-Instruments-datasheet-159115118.pdf?src-supplier=LCSC, ComponentLink13Description=https://datasheet.octopart.com:443/LM358P-Texas-Instruments-datasheet-147835639.pdf?src-supplier=SHENGYU+ELECTRONICS, ComponentLink13URL=https://datasheet.octopart.com:443/LM358P-Texas-Instruments-datasheet-147835639.pdf?src-supplier=SHENGYU+ELECTRONICS, ComponentLink14Description=https://datasheet.octopart.com:443/LM358P-Texas-Instruments-datasheet-101363746.pdf?src-supplier=Megastar, ComponentLink14URL=https://datasheet.octopart.com:443/LM358P-Texas-Instruments-datasheet-101363746.pdf?src-supplier=Megastar, ComponentLink15Description=https://datasheet.octopart.com:443/LM358P-Texas-Instruments-datasheet-137316104.pdf?src-supplier=Future+Electronics, ComponentLink15URL=https://datasheet.octopart.com:443/LM358P-Texas-Instruments-datasheet-137316104.pdf?src-supplier=Future+Electronics, ComponentLink16Description=https://datasheet.octopart.com:443/LM358P-Texas-Instruments-datasheet-21220556.pdf?src-supplier=Newark, ComponentLink16URL=https://datasheet.octopart.com:443/LM358P-Texas-Instruments-datasheet-21220556.pdf?src-supplier=Newark, ComponentLink17Description=https://datasheet.octopart.com:443/LM358P-Texas-Instruments-datasheet-14137277.pdf?src-supplier=iiiC, ComponentLink17URL=https://datasheet.octopart.com:443/LM358P-Texas-Instruments-datasheet-14137277.pdf?src-supplier=iiiC, ComponentLink18Description=https://datasheet.octopart.com:443/LM358P-Texas-Instruments-datasheet-10086281.pdf?src-supplier=element14, ComponentLink18URL=https://datasheet.octopart.com:443/LM358P-Texas-Instruments-datasheet-10086281.pdf?src-supplier=element14, ComponentLink19Description=https://datasheet.octopart.com:443/LM358P-Texas-Instruments-datasheet-8861238.pdf?src-supplier=element14, ComponentLink19URL=https://datasheet.octopart.com:443/LM358P-Texas-Instruments-datasheet-8861238.pdf?src-supplier=element14, ComponentLink20Description=https://datasheet.octopart.com:443/LM358P-Texas-Instruments-datasheet-8728431.pdf?src-supplier=element14, ComponentLink20URL=https://datasheet.octopart.com:443/LM358P-Texas-Instruments-datasheet-8728431.pdf?src-supplier=element14, ComponentLink21Description=https://datasheet.octopart.com:443/LM358P-Texas-Instruments-datasheet-8637033.pdf?src-supplier=element14, ComponentLink21URL=https://datasheet.octopart.com:443/LM358P-Texas-Instruments-datasheet-8637033.pdf?src-supplier=element14, ComponentLink22Description=https://datasheet.octopart.com:443/LM358P-Texas-Instruments-datasheet-17597669.pdf?src-supplier=TME, ComponentLink22URL=https://datasheet.octopart.com:443/LM358P-Texas-Instruments-datasheet-17597669.pdf?src-supplier=TME, ComponentLink23Description=https://datasheet.octopart.com:443/LM358P-Texas-Instruments-datasheet-8220297.pdf?src-supplier=Jameco, ComponentLink23URL=https://datasheet.octopart.com:443/LM358P-Texas-Instruments-datasheet-8220297.pdf?src-supplier=Jameco, ComponentLink24Description=https://datasheet.octopart.com:443/LM358P-Texas-Instruments-datasheet-111658.pdf?src-supplier=Sierra+IC, ComponentLink24URL=https://datasheet.octopart.com:443/LM358P-Texas-Instruments-datasheet-111658.pdf?src-supplier=Sierra+IC, ComponentLink25Description=http://sigma.octopart.com:80/reach_statement/Texas-Instruments-company-64.pdf?src-supplier=Compliance+Statements, ComponentLink25URL=http://sigma.octopart.com:80/reach_statement/Texas-Instruments-company-64.pdf?src-supplier=Compliance+Statements, ComponentLink26Description=http://sigma.octopart.com:80/conflict_mineral_statement/Texas-Instruments-company-63.pdf?src-supplier=Compliance+Statements, ComponentLink26URL=http://sigma.octopart.com:80/conflict_mineral_statement/Texas-Instruments-company-63.pdf?src-supplier=Compliance+Statements, Contact Plating=Gold, Gain Bandwidth Product=700kHz, Height=5.08mm, Lead Free="Lead Free", Length=9.81mm, Lifecycle Status=Production, Manufacturer Part Number=LM358P, Mount="Through Hole", Number of Amplifiers=2, Number of Channels=2, Number of Circuits=2, Number of Elements=2, Number of Pins=8, Operating Supply Voltage=16V, Output Current per Channel=30mA, Pricing 1="1=0.27, 10=0.187, 50=0.153, 100=0.1423, 250=0.13104, 500=0.12426, 1000=0.11868, 2500=0.11278, 5000=0.1102 (USD)", Radiation Hardening=No, REACH SVHC=No, RoHS=Compliant, Schedule B="8542330000, 8542330000|8542330000|8542330000|8542330000|8542330000|8542330000|8542330000|8542330000|8542330000|8542330000|8542330000|8542330000|8542330000|8542330000|8542330000|8542330000|8542330000|8542330000|8542330000|8542330000|8542330000|8542330000|8542330000|85", Slew Rate=0.3V/µs, Stock 1=72654, Supplier 1=DigiKey, Thickness=3.9mm, Width=6.35mm
U7: library part CD4051BE, "CD4051B Series 20 V 100 nA CMOS Single 8-Channel Analog Multiplexer - PDIP-16", Case/Package=PDIP, Drain to Source Resistance=240Ω, Dual Supply Voltage=3V, Manufacturer="Texas Instruments", Manufacturer Lifecycle Status=ACTIVE, Max Dual Supply Voltage=9V, Max Operating Temperature=125°C, Max Supply Voltage=20V, Min Dual Supply Voltage=2.5V, Min Operating Temperature=-55°C, Nominal Supply Current=80nA, Operating Supply Voltage=18V, Supplier Part Number 1=296-2057-5-ND, Bandwidth=20MHz, Category="Analog Switches and Multiplexers", ComponentLink1Description=https://datasheet.octopart.com:443/CD4051BE-Texas-Instruments-datasheet-41214435.pdf?src-supplier=Texas+Instruments, ComponentLink1URL=https://datasheet.octopart.com:443/CD4051BE-Texas-Instruments-datasheet-41214435.pdf?src-supplier=Texas+Instruments, ComponentLink2Description=https://octopart.com:443/opatz8j6/c1?t=UIfRW14eXhIfOF-oFZ6Q5J66j7PnUsDjt-DLRZv_ne4_WiumMkbXx4rniWKDRQWco0c1A10nEU92iBnjKMIo5KjEBL51Ak-2lkuqMbbpcID5g9fRMoz5DgekRImzSQik1OPk2t9RJpeedauIwahmVtI3gTHC42d6XSj0Uau-qhabpl_wXRd-29TaXMBJ7wO7fIz0V_HzD_C70tPsu40Tn1cil4nKPp6cB3GfDvcANLGUEQXsGt6YWVv3-ioL5EzUk8hYm1ZisYe4m3mFIzjPX1C895qkWPqY_VotFC2s6MaYWvoNxagzj2oPdc8hXeyaNzAy6VkZktOcbdmdhbAVYym2grw-0VwWrIK_rtRIbd5hGGQdgoqSEIJ3mXl6Yi3iSw&src-supplier=Texas+Instruments, ComponentLink2URL=https://octopart.com:443/opatz8j6/c1?t=UIfRW14eXhIfOF-oFZ6Q5J66j7PnUsDjt-DLRZv_ne4_WiumMkbXx4rniWKDRQWco0c1A10nEU92iBnjKMIo5KjEBL51Ak-2lkuqMbbpcID5g9fRMoz5DgekRImzSQik1OPk2t9RJpeedauIwahmVtI3gTHC42d6XSj0Uau-qhabpl_wXRd-29TaXMBJ7wO7fIz0V_HzD_C70tPsu40Tn1cil4nKPp6cB3GfDvcANLGUEQXsGt6YWVv3-ioL5EzUk8hYm1ZisYe4m3mFIzjPX1C895qkWPqY_VotFC2s6MaYWvoNxagzj2oPdc8hXeyaNzAy6VkZktOcbdmdhbAVYym2grw-0VwWrIK_rtRIbd5hGGQdgoqSEIJ3mXl6Yi3iSw&src-supplier=Texas+Instruments, ComponentLink3Description=https://datasheet.octopart.com:443/CD4051BE-Texas-Instruments-datasheet-148785.pdf?src-supplier=Texas+Instruments, ComponentLink3URL=https://datasheet.octopart.com:443/CD4051BE-Texas-Instruments-datasheet-148785.pdf?src-supplier=Texas+Instruments, ComponentLink4Description=https://sigma.octopart.com:443/49249812/technical_drawing/Texas-Instruments-CD4051BE.pdf?src-supplier=Texas+Instruments, ComponentLink4URL=https://sigma.octopart.com:443/49249812/technical_drawing/Texas-Instruments-CD4051BE.pdf?src-supplier=Texas+Instruments, ComponentLink5Description=https://datasheet.octopart.com:443/CD4051BE-Texas-Instruments-datasheet-10253597.pdf?src-supplier=Farnell, ComponentLink5URL=https://datasheet.octopart.com:443/CD4051BE-Texas-Instruments-datasheet-10253597.pdf?src-supplier=Farnell, ComponentLink6Description=https://datasheet.octopart.com:443/CD4051BE-Texas-Instruments-datasheet-62345999.pdf?src-supplier=Farnell, ComponentLink6URL=https://datasheet.octopart.com:443/CD4051BE-Texas-Instruments-datasheet-62345999.pdf?src-supplier=Farnell, ComponentLink7Description=https://datasheet.octopart.com:443/CD4051BE-Texas-Instruments-datasheet-8384997.pdf?src-supplier=Farnell, ComponentLink7URL=https://datasheet.octopart.com:443/CD4051BE-Texas-Instruments-datasheet-8384997.pdf?src-supplier=Farnell, ComponentLink8Description=https://datasheet.octopart.com:443/CD4051BE-Texas-Instruments-datasheet-10694235.pdf?src-supplier=Farnell, ComponentLink8URL=https://datasheet.octopart.com:443/CD4051BE-Texas-Instruments-datasheet-10694235.pdf?src-supplier=Farnell, ComponentLink9Description=https://datasheet.octopart.com:443/CD4051BE-Texas-Instruments-datasheet-10411452.pdf?src-supplier=Farnell, ComponentLink9URL=https://datasheet.octopart.com:443/CD4051BE-Texas-Instruments-datasheet-10411452.pdf?src-supplier=Farnell, ComponentLink10Description=https://datasheet.octopart.com:443/CD4051BE-Texas-Instruments-datasheet-10189767.pdf?src-supplier=Farnell, ComponentLink10URL=https://datasheet.octopart.com:443/CD4051BE-Texas-Instruments-datasheet-10189767.pdf?src-supplier=Farnell, ComponentLink11Description=https://datasheet.octopart.com:443/CD4051BE-Texas-Instruments-datasheet-8763554.pdf?src-supplier=Farnell, ComponentLink11URL=https://datasheet.octopart.com:443/CD4051BE-Texas-Instruments-datasheet-8763554.pdf?src-supplier=Farnell, ComponentLink12Description=https://datasheet.octopart.com:443/CD4051BE-Texas-Instruments-datasheet-5330332.pdf?src-supplier=Farnell, ComponentLink12URL=https://datasheet.octopart.com:443/CD4051BE-Texas-Instruments-datasheet-5330332.pdf?src-supplier=Farnell, ComponentLink13Description=https://datasheet.octopart.com:443/CD4051BE-Texas-Instruments-datasheet-5364360.pdf?src-supplier=Farnell, ComponentLink13URL=https://datasheet.octopart.com:443/CD4051BE-Texas-Instruments-datasheet-5364360.pdf?src-supplier=Farnell, ComponentLink14Description=https://datasheet.octopart.com:443/CD4051BE-Texas-Instruments-datasheet-17021337.pdf?src-supplier=Future+Electronics, ComponentLink14URL=https://datasheet.octopart.com:443/CD4051BE-Texas-Instruments-datasheet-17021337.pdf?src-supplier=Future+Electronics, ComponentLink15Description=https://datasheet.octopart.com:443/CD4051BE-Texas-Instruments-datasheet-42768.pdf?src-supplier=Mouser, ComponentLink15URL=https://datasheet.octopart.com:443/CD4051BE-Texas-Instruments-datasheet-42768.pdf?src-supplier=Mouser, ComponentLink16Description=https://datasheet.octopart.com:443/CD4051BE-Texas-Instruments-datasheet-159114769.pdf?src-supplier=Burklin+Elektronik, ComponentLink16URL=https://datasheet.octopart.com:443/CD4051BE-Texas-Instruments-datasheet-159114769.pdf?src-supplier=Burklin+Elektronik, ComponentLink17Description=https://datasheet.octopart.com:443/CD4051BE-Texas-Instruments-datasheet-47642707.pdf?src-supplier=TME, ComponentLink17URL=https://datasheet.octopart.com:443/CD4051BE-Texas-Instruments-datasheet-47642707.pdf?src-supplier=TME, ComponentLink18Description=https://datasheet.octopart.com:443/CD4051BE-Texas-Instruments-datasheet-163810140.pdf?src-supplier=SHENGYU+ELECTRONICS, ComponentLink18URL=https://datasheet.octopart.com:443/CD4051BE-Texas-Instruments-datasheet-163810140.pdf?src-supplier=SHENGYU+ELECTRONICS, ComponentLink19Description=https://datasheet.octopart.com:443/CD4051BE-Texas-Instruments-datasheet-163656050.pdf?src-supplier=LCSC, ComponentLink19URL=https://datasheet.octopart.com:443/CD4051BE-Texas-Instruments-datasheet-163656050.pdf?src-supplier=LCSC, ComponentLink20Description=https://datasheet.octopart.com:443/CD4051BE-Texas-Instruments-datasheet-37129006.pdf?src-supplier=Newark, ComponentLink20URL=https://datasheet.octopart.com:443/CD4051BE-Texas-Instruments-datasheet-37129006.pdf?src-supplier=Newark, ComponentLink21Description=https://datasheet.octopart.com:443/CD4051BE-Texas-Instruments-datasheet-21220570.pdf?src-supplier=Newark, ComponentLink21URL=https://datasheet.octopart.com:443/CD4051BE-Texas-Instruments-datasheet-21220570.pdf?src-supplier=Newark, ComponentLink22Description=https://datasheet.octopart.com:443/CD4051BE-Texas-Instruments-datasheet-32026515.pdf?src-supplier=element14+APAC, ComponentLink22URL=https://datasheet.octopart.com:443/CD4051BE-Texas-Instruments-datasheet-32026515.pdf?src-supplier=element14+APAC, ComponentLink23Description=https://datasheet.octopart.com:443/CD4051BE-Texas-Instruments-datasheet-14119637.pdf?src-supplier=iiiC, ComponentLink23URL=https://datasheet.octopart.com:443/CD4051BE-Texas-Instruments-datasheet-14119637.pdf?src-supplier=iiiC, ComponentLink24Description=https://datasheet.octopart.com:443/CD4051BE-Texas-Instruments-datasheet-10104488.pdf?src-supplier=element14, ComponentLink24URL=https://datasheet.octopart.com:443/CD4051BE-Texas-Instruments-datasheet-10104488.pdf?src-supplier=element14, ComponentLink25Description=https://datasheet.octopart.com:443/CD4051BE-Texas-Instruments-datasheet-10059866.pdf?src-supplier=element14, ComponentLink25URL=https://datasheet.octopart.com:443/CD4051BE-Texas-Instruments-datasheet-10059866.pdf?src-supplier=element14, ComponentLink26Description=https://datasheet.octopart.com:443/CD4051BE-Texas-Instruments-datasheet-7280354.pdf?src-supplier=Jameco, ComponentLink26URL=https://datasheet.octopart.com:443/CD4051BE-Texas-Instruments-datasheet-7280354.pdf?src-supplier=Jameco, ComponentLink27Description=https://datasheet.octopart.com:443/CD4051BE-Texas-Instruments-datasheet-38186.pdf?src-supplier=RS+(Formerly+Allied+Electronics), ComponentLink27URL=https://datasheet.octopart.com:443/CD4051BE-Texas-Instruments-datasheet-38186.pdf?src-supplier=RS+(Formerly+Allied+Electronics), ComponentLink28Description=https://datasheet.octopart.com:443/CD4051BE-Texas-Instruments-datasheet-115798.pdf?src-supplier=Sierra+IC, ComponentLink28URL=https://datasheet.octopart.com:443/CD4051BE-Texas-Instruments-datasheet-115798.pdf?src-supplier=Sierra+IC, ComponentLink29Description=http://sigma.octopart.com:80/reach_statement/Texas-Instruments-company-64.pdf?src-supplier=Compliance+Statements, ComponentLink29URL=http://sigma.octopart.com:80/reach_statement/Texas-Instruments-company-64.pdf?src-supplier=Compliance+Statements, ComponentLink30Description=http://sigma.octopart.com:80/conflict_mineral_statement/Texas-Instruments-company-63.pdf?src-supplier=Compliance+Statements, ComponentLink30URL=http://sigma.octopart.com:80/conflict_mineral_statement/Texas-Instruments-company-63.pdf?src-supplier=Compliance+Statements, Contact Plating=Tin, Height=5.08mm, Lead Free="Lead Free", Length=19.3mm, Lifecycle Status=Production, Logic Function="Demultiplexer, Multiplexer, Mux", Manufacturer Part Number=CD4051BE, Min Supply Voltage=3V, Min Supply Voltage (DC)=3V, Mount="Through Hole", Number of Bits=8, Number of Channels=8, Number of Circuits=1, Number of Gates=1, Number of Inputs=8, Number of Pins=16, Operating Supply Current=80nA, Polarity=Non-Inverting, Pricing 1="1=0.8, 10=0.568, 25=0.5108, 100=0.4479, 250=0.41796, 500=0.3999, 1000=0.38504, 2500=0.36936, 5000=0.35991 (USD)", Propagation Delay=60ns, Quiescent Current=80nA, Radiation Hardening=No, REACH SVHC=No, Resistance=240Ω, RoHS=Compliant, Schedule B="8542390000, 8542390000|8542390000|8542390000|8542390000|8542390000|8542390000|8542390000|8542390000|8542390000|8542390000|8542390000|8542390000|8542390000|8542390000|8542390000|8542390000|8542390000|8542390000|8542390000|8542390000|8542390000|8542390000|8542390000|85", Stock 1=4495, Supplier 1=DigiKey, Supply Type="Dual, Single", Thickness=3.9mm, Turn-Off Delay Time=450ns, Turn-On Delay Time=720ns, Weight=951.693491mg, Width=6.35mm